# Altium PCB usb2ttl.PcbDoc
Units mm, origin at the board's own origin, x right, y up, seen from the top; angles counter-clockwise.
Board outline 64.77 x 22.86 mm, 2 copper layers (Top Layer, Bottom Layer); 18 components, 15 nets, 58 pads, 7 vias.
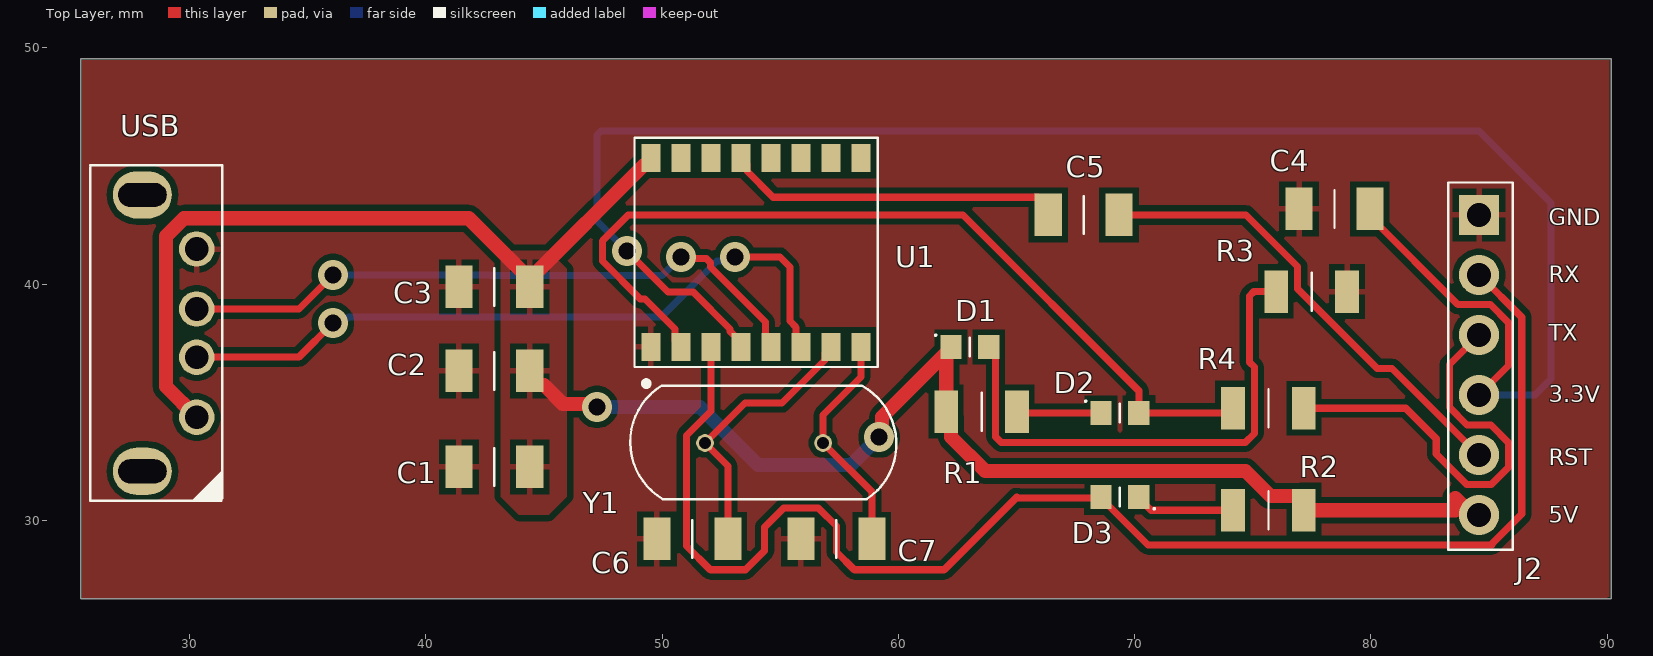
[diagram p0: Top Layer view]
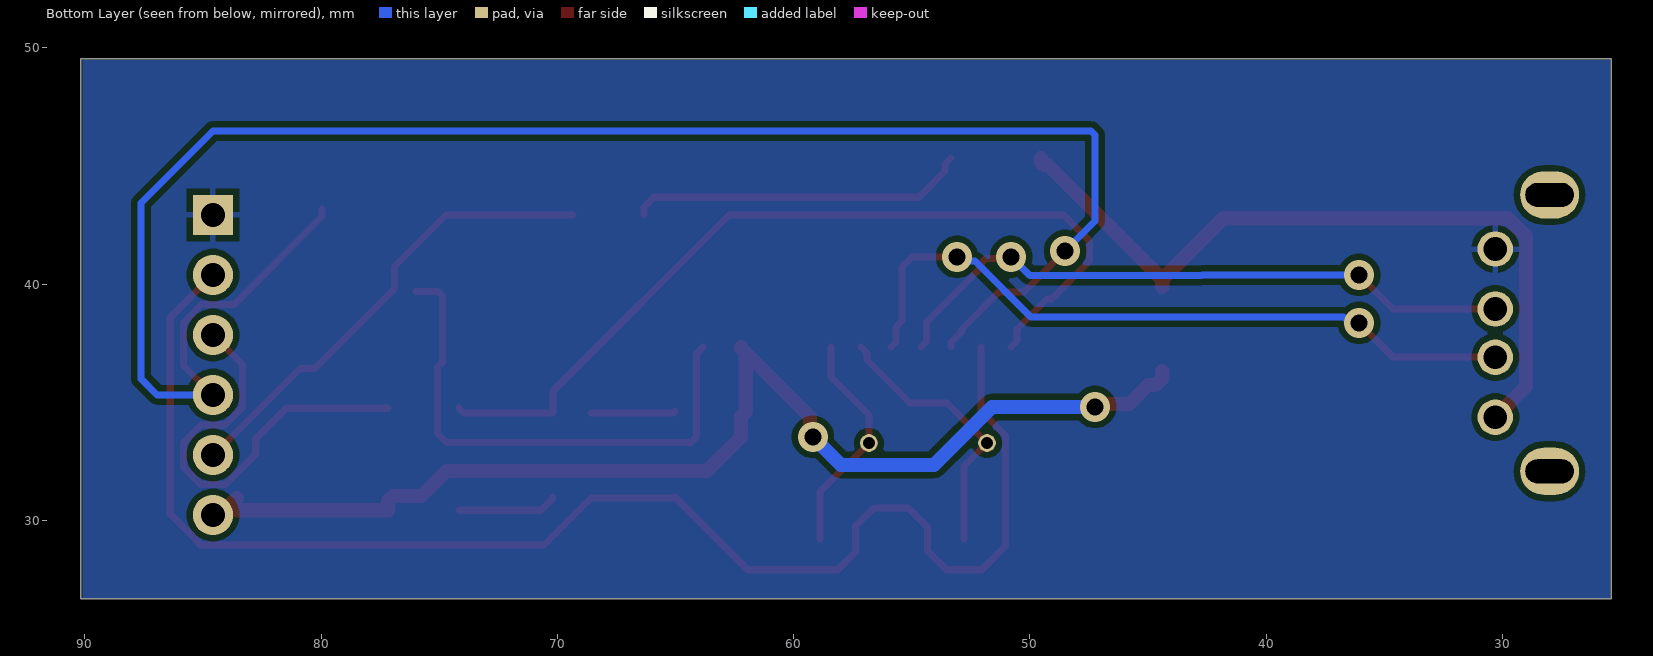
[diagram p1: Bottom Layer view, seen from below]
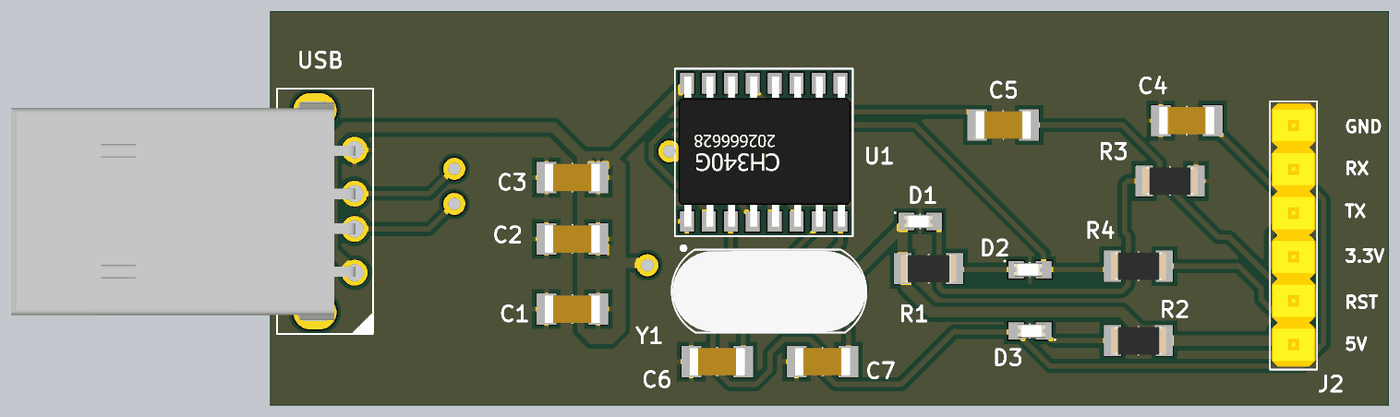
[diagram p2: 3D render of the assembled board from above, using the file's embedded part models]

## Layer stack, top to bottom
Top Solder: solder mask 0.0102, Solder Resist, Dk 3.5
Top Layer: signal copper 0.0356
Dielectric 1: dielectric 0.32, FR-4, Dk 4.8
Bottom Layer: signal copper 0.0356
Bottom Solder: solder mask 0.0102, Solder Resist, Dk 3.5

## Board outline
25.4,26.67 25.4,49.53 90.17,49.53 90.17,26.67

## Design rules (kind name [scope] priority, off if disabled: settings)
Clearance [All] p1: gap=0.254 ignorepadtopadclearanceinfootprint=FALSE except(0: Arc-Hole Track-Hole SMDPad-Hole THPad-Hole Via-Hole Fill-Hole Poly-Hole Region-Hole Text-Hole)
HoleSize [All] p1: absolutevalues=TRUE maxlimit=3 minlimit=0.025 maxpercent=80.000 minpercent=20.000
HoleToHoleClearance [All] p1: gap=0.1 allowstackedmicrovias=TRUE
MinimumSolderMaskSliver [All] p1: minsoldermaskwidth=0.1
PolygonConnect [All] p1: connectstyle=Relief reliefconductorwidth=0.254 reliefentries=4 polygonreliefangle="90 Angle" airgapwidth=0.254
RoutingVias [All] p1: holewidth=0.711 width=1.27 viastyle="Through Hole" minholewidth=0.711 minwidth=1.27 maxholewidth=0.711 maxwidth=1.27
SilkToSilkClearance [All] p1: silktosilkclearance=0.1
SilkToSolderMaskClearance [IsPad] p1: minsilkscreentomaskgap=0.1 clearancetoexposedcopper=TRUE
SolderMaskExpansion [All] p1: expansion=0.102 istentingtop=FALSE
Width [All] p1: maxlimit=1 minlimit=0.254 preferedwidth=0.3
25 further rules are at their usual default settings.

## Components (designator, comment, footprint, x,y, rotation, side; value= is the part's Value field where it differs from the comment)
C1 "C1206 100nF" C1206 42.926,32.258 r0 top
C2 "C1206 10uF" C1206 42.926,36.322 r0 top
C3 "C1206 100nF" C1206 42.926,39.878 r0 top
C4 "C1206 100nF" C1206 78.486,43.18 r0 top
C5 "C1206 100nF" C1206 67.818,42.926 r180 top
C6 "C1206 22pF" C1206 51.309,29.21 r0 top
C7 "C1206 22pF" C1206 57.404,29.21 r0 top
D1 "LED 0603" "LED 0603" 62.23,37.338 r0 top
D2 "LED 0603" "LED 0603" 68.58,34.544 r0 top
D3 "LED 0603" "LED 0603" 70.18,30.988 r180 top
J2 "1x6 MALE HEADER" "1X6 MALE HEADER" 84.582,42.926 r270 top
R1 "R1206 1.5K" R1206 63.5,34.798 r180 top
R2 "R1206 1.5K" R1206 75.692,30.226 r0 top
R3 "R1206 1.5K" R1206 77.47,39.878 r180 top
R4 "R1206 1.5K" R1206 75.692,34.544 r0 top
U1 "CH340G" CH340G 49.53,38.988 r90 top
USB "USB_A MALE" USBA_MALE 29.8,39.575 r90 top (schematic designator J1)
Y1 "12Mz Crystal" "12MHZ CRYSTAL" 51.816,33.274 r0 top

## Footprints (in the part's own frame and the unit in brackets; to place one, negate y for a bottom-side part, rotate by r counter-clockwise, add the part's x,y. Pads: shape width x height; smd on the part's side, far side on the other; paste and mask are expansions set on the pad)
"1X6 MALE HEADER" [mm]
  rect 1.7x1.7 hole 1: 1(0,0)
  round 1.7 hole 1: 2(2.54,0) 3(5.08,0) 4(7.62,0) 5(10.16,0) 6(12.7,0)
  silkscreen extent -1.38,-1.3 14.18,1.43, body extent -1.24,-1.21 14,1.33, height 9.5
"12MHZ CRYSTAL" [mm]
  round 0.75 hole 0.5 mask+0.05: 1(0,0)
  round 0.75 hole 0.5: 2(5,0)
  silkscreen extent -3.17,-2.37 8.1,2.42, body extent -3.11,-2.32 8.06,2.35, height 3.63
C1206 [mm]
  rect 1.15x1.8 smd mask+0.05: 1(-1.525,0) 2(1.475,0)
  silkscreen extent -0.02,-0.8 -0.02,0.81, body extent -1.62,-0.8 1.58,0.8, height 1
CH340G [mm]
  rect 1.2x0.8 smd mask+0.1: 1(-1.65,0) 2(-1.65,-1.27) 3(-1.65,-2.54) 4(-1.65,-3.81) 5(-1.65,-5.08) 6(-1.65,-6.35) 7(-1.65,-7.62) 8(-1.65,-8.89) 9(6.35,-8.89)
  rect 1.2x0.8 smd: 10(6.35,-7.62) 11(6.35,-6.35) 12(6.35,-5.08) 13(6.35,-3.81) 14(6.35,-2.54) 15(6.35,-1.27) 16(6.35,0)
  silkscreen extent -3.3,-9.6 7.2,0.7, body extent -1.96,-9.5 6.76,0.5, height 1.5
"LED 0603" [mm]
  rect 0.9x1 smd: 1(0,0) 2(1.6,0)
  silkscreen extent -0.67,-0.4 0.8,0.52, body extent -0.11,-0.4 1.51,0.4, height 0.6
R1206 [mm]
  rect 1x1.8 smd mask+0.05: 1(-1.525,0.2) 2(1.475,0.2)
  silkscreen extent -0.02,-0.6 -0.02,1.01, body extent -1.62,-0.6 1.58,1.01, height 0.55
USBA_MALE [mm]
  round 1.5 hole 1 mask+0.05: 1(-5.21,-0.5) 2(-2.67,-0.5) 3(-0.63,-0.5) 4(1.91,-0.5)
  oval 2x2.5 hole 1 slot 2.05 at 90 deg paste+0: 5(-7.5,1.8) 6(4.2,1.8)
  silkscreen extent -8.78,-1.58 5.45,4, body extent -7.95,-0.55 4.65,19.38, height 4.5

## Via types
v1: diameter 1.27, hole 0.711, Top Layer to Bottom Layer, 7 vias

## Nets (pads, with @x,y where several pads share a name; then routed paths per layer and width w, separated by ;. In a path a pad name is that pad's centre, name@x,y a point inside that pad or via, vN(x,y) a via of type N, cw(c..) or ccw(c..) an arc to the next point about the centre after c; other vN are vias at no path point)
3.3V: C4.2 J2.4 U1.4 | length 76.3
  Top Layer w0.3: v1(48.514,41.402) 50.255,39.661 51.318,39.661 52.874,38.105 52.874,38.004 53.34,37.538 U1.4 ; C4.2 79.961,42.855 83.684,39.132 85.069,39.132 85.836,38.365 85.836,36.56 J2.4
  Bottom Layer w0.3: v1(48.514,41.402) 47.244,42.672 47.244,46.306 47.42,46.482 84.582,46.482 87.63,43.434 87.63,35.99 86.946,35.306 J2.4
5V: C1.2 C2.2 C3.2 D1.1 J2.6 R1.2 R2.2 U1.16 USB.1 | length 82.7
  Top Layer w0.6: USB.1 28.996,35.669 28.996,42.025 29.76,42.789 41.815,42.789 C3.2@44.401,40.203 ; C2.2 44.401,35.997 44.676,35.722 45.001,35.722 45.797,34.926 47.116,34.926 v1(47.244,34.798) ; C3.2 C3.2@44.401,40.203 ; U1.16 49.53,45.138 49.43,45.038 49.236,45.038 C3.2@44.401,40.203 ; v1(59.182,33.528) 59.31,33.656 59.31,34.368 D1.1@62.025,37.083 ; D1.1 62.23,37.288 D1.1@62.025,37.083 ; 83.576,30.426 R2.2 77.167,30.826 76.967,31.026 75.75,31.026 74.694,32.082 63.676,32.082 62.225,33.533 62.225,34.398 R1.2 D1.1@62.025,37.083 ; 83.576,30.934 84.284,30.226 J2.6
  Bottom Layer w0.6: v1(47.244,34.798) 51.606,34.798 54.059,32.345 57.999,32.345 v1(59.182,33.528)
GND: C1.1 C2.1 C3.1 C4.1 C6.1 C7.1 J2.1 R3.1 U1.1 USB.4
NetC5_1: C5.1 J2.5 | length 20
  Top Layer w0.3: C5.1 74.718,42.926 76.899,40.745 76.899,39.803 80.274,36.428 80.903,36.428 84.565,32.766 J2.5
NetC5_2: C5.2 U1.13 | length 14.4
  Top Layer w0.3: U1.13 53.59,45.088 53.59,44.787 54.701,43.676 65.918,43.676 66.343,43.251 C5.2
NetC6_2: C6.2 U1.7 Y1.1 | length 11.7
  Top Layer w0.3: C6.2 52.784,32.306 Y1.1 53.507,34.965 55.079,34.965 56.9,36.787 56.9,37.088 U1.7
NetC7_2: C7.2 U1.8 Y1.2 | length 9.6
  Top Layer w0.3: U1.8 58.42,36.069 56.816,34.465 Y1.2 58.879,31.211 C7.2
NetD1_2: D1.2 R3.2 | length 22.2
  Top Layer w0.3: D1.2 64.121,37.047 64.121,33.531 64.358,33.294 74.688,33.294 75.071,33.677 75.071,36.489 74.869,36.69 74.869,39.502 75.045,39.678 R3.2
NetD2_1: D2.1 R1.1 | length 3.6
  Top Layer w0.3: R1.1 65.079,34.544 D2.1
NetD2_2: D2.2 R4.1 U1.2 | length 37.2
  Top Layer w0.3: U1.2 50.55,37.588 50.55,38.096 49.276,39.37 49.077,39.37 47.475,40.972 47.475,41.832 48.569,42.926 62.738,42.926 70.18,35.484 D2.2 73.967,34.544 R4.1
NetD3_1: D3.1 R2.1 | length 4.2
  Top Layer w0.3: D3.1 70.18,30.938 70.692,30.426 R2.1
NetD3_2: D3.2 J2.2 U1.3 | length 61.6
  Top Layer w0.3: U1.3 52.07,34.63 51.037,33.597 51.037,28.911 52.042,27.906 53.526,27.906 54.332,28.711 54.332,29.709 55.137,30.514 56.621,30.514 57.379,29.756 57.379,28.664 58.137,27.906 61.942,27.906 65.012,30.976 ; 64.978,30.938 68.58,30.938 70.562,28.956 85.139,28.956 ; J2.2 84.599,40.386 86.39,38.595 86.39,30.261 85.101,28.972
NetJ1_2: U1.6 USB.2 | length 30.7
  Top Layer w0.3: USB.2 34.619,36.905 v1(36.068,38.354) ; USB.2@30.304,36.799 USB.2@30.369,36.864 ; v1(53.086,41.148) 54.984,41.148 55.414,40.718 55.414,38.431 55.675,38.17 55.675,37.543 U1.6
  Bottom Layer w0.3: v1(36.068,38.354) 36.254,38.54 36.665,38.54 36.729,38.604 49.961,38.604 52.329,40.971 52.909,40.971 v1(53.086,41.148)
NetJ1_3: U1.5 USB.3 | length 27.4
  Top Layer w0.3: USB.3 34.627,38.945 v1(36.068,40.386) ; v1(50.8,41.148) 50.869,41.079 51.871,41.079 52.047,40.903 52.047,40.718 54.377,38.388 54.377,37.571 U1.5
  Bottom Layer w0.3: v1(36.068,40.386) 42.719,40.386 42.742,40.363 50.005,40.363 50.79,41.148 v1(50.8,41.148)
NetJ2_3: J2.3 R4.2 | length 18.4
  Top Layer w0.3: R4.2 81.48,34.744 82.771,33.453 82.771,32.803 84.063,31.512 85.101,31.512 85.836,32.247 85.836,33.285 85.085,34.036 84.079,34.036 83.328,34.787 83.328,36.592 J2.3
pads on no net: U1.9 U1.10 U1.11 U1.12 U1.14 U1.15 USB.5 USB.6

## Polygon pours and split planes (outlines as drawn)
GND on Top Layer "GND_L01_P004" (solid, pour order 4): 25.425,49.475 25.45,49.45 25.45,26.725 90.081,26.725 90.109,26.753 90.1,26.762 90.1,49.475 25.45,49.475
5V on Top Layer "5V_L01_P000" (solid, remove dead copper, pour order 0): 43.688,41.402 45.212,41.402 45.974,40.64 45.974,30.988 45.212,30.226 43.942,30.226 43.18,30.988 43.18,41.148 43.434,41.148 43.18,41.148
GND on Bottom Layer "GND_L02_P005" (solid, remove dead copper, pour order 5): 25.45,49.475 90.1,49.475 90.1,26.75 90.125,26.725 25.45,26.725

## Silkscreen, mask and mechanical layers (free items; w line width, h text height)
Top Overlay:
  text "GND" at 87.525,42.5 h0.7
  text "RX" at 87.525,40.075 h0.7
  text "TX" at 87.525,37.6 h0.7
  text "3.3V" at 87.525,35 h0.7
  text "RST" at 87.525,32.325 h0.7
  text "5V" at 87.525,29.9 h0.7
Mechanical 1:
  lines w0.1: 25.4,26.67 42.672,26.67 75.692,26.67 90.17,26.67 90.17,49.53 25.4,49.53 25.4,26.67